# EAGLE board LEDBOARD_v2 (EAGLE 9.5.2)
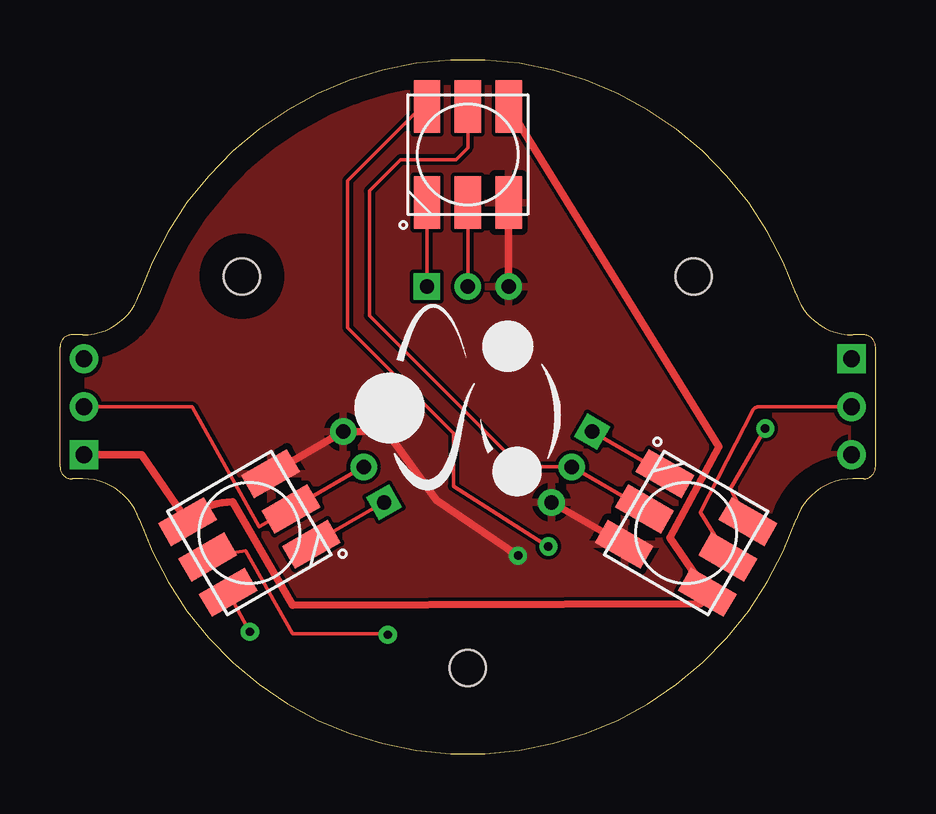
[diagram p0: board, top side]
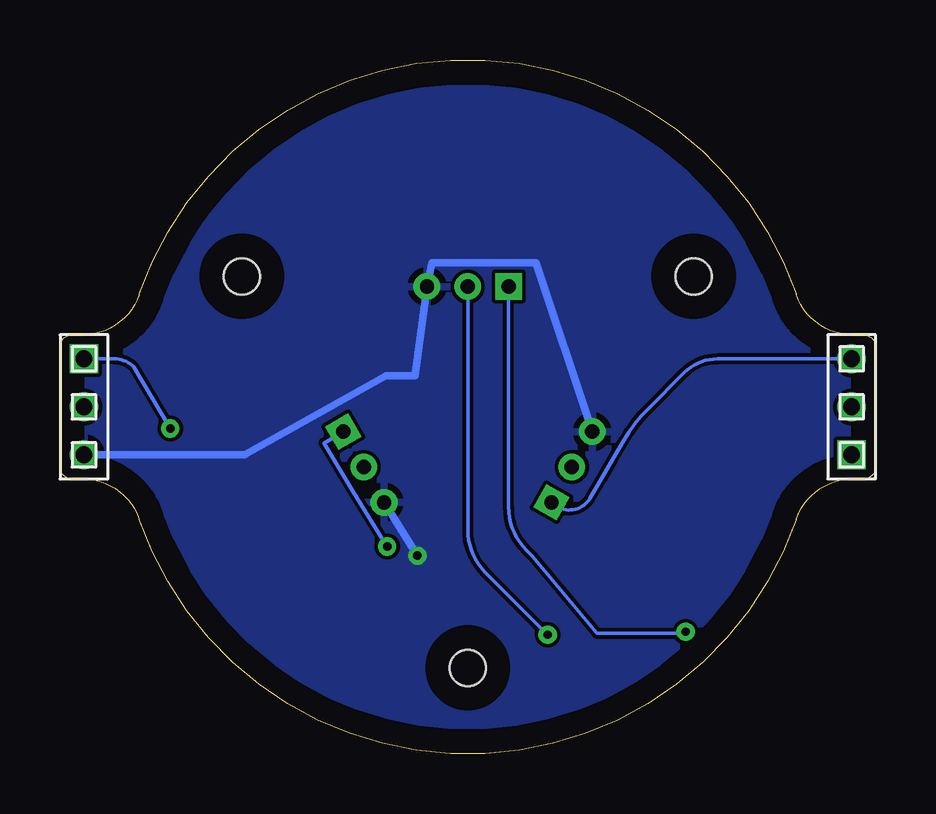
[diagram p1: board, bottom side, seen from below]

Size 34 x 28.9 mm. Coordinates in mm from the lower left corner, seen from the top.
Outline: 33.5,11.45 33.05,11.45 arc71 30.69,9.76 arc-142 3.31,9.76 arc71 0.95,11.45 0.5,11.45 arc-90 0,11.95 0,16.95 arc-90 0.5,17.45 0.95,17.45 arc71 3.31,19.14 arc-142 30.69,19.14 arc71 33.05,17.45 33.5,17.45 arc-90 34,16.95 34,11.95 arc-90 33.5,11.45
Copper layers (1*16): Top 0.035mm / dielectric 1.5mm / Bottom 0.035mm
Design rules "default": minimum track width 6mil, minimum drill 0.35mm, track to track 6mil, track to pad 6mil, pad to pad 6mil, via to via 6mil, smd to smd 6mil, copper to edge 40mil, drill to drill 6mil, minimum pad ring 10mil, minimum via ring 8mil, stop-mask expansion 4mil, vias tented up to drill 0mil, thermal gap 10mil
Net classes: 0 default: width 0.152 mm; 1 power: width 0.254 mm

## Footprints (pad centres in the part's own frame; a part is rotated, then mirrored left to right if it is on the bottom)
APA102_5050_SB = smd 1.1 x 2.2: 1 1.7,4; 2 0,4; 3 -1.7,4; 4 -1.7,0; 5 0,0; 6 1.7,0 | drill 0.6: CI2 0,7.5; GND2 -1.7,7.5 | drill 0.6 square: DI2 1.7,7.5
SMARTBALL_LOGO = hole 1.5: 0,-10.876; -9.419,5.438; 9.419,5.438
CONN03_SMD_MALE = drill 0.7 square: 1 -2,0 | drill 0.7: 2 0,0; 3 2,0

## Placement (x,y rotation side)
L1  APA102  [APA102_5050_SB]  6.16,8.2 300 top
L2  APA102  [APA102_5050_SB]  17,26.96 180 top
L3  APA102  [APA102_5050_SB]  27.84,8.2 60 top
U$4  LOGO_SMARTBALL  [SMARTBALL_LOGO]  17,14.45 0 top
U$5  CONN_03_SMD_MALECONN03_SMD_MALE  [CONN03_SMD_MALE]  1,14.45 90 bottom
U$6  CONN_03_SMD_MALECONN03_SMD_MALE  [CONN03_SMD_MALE]  33,14.45 270 bottom

## Library data of the parts
L1-L3 U$4-U$6 = Smartball

## Nets
+5V: L1.4 L2.4 L3.4 U$5.1
CI: L1.2 L1.CI2 U$5.2
CO: L3.5 U$6.2
DI: L1.1 L1.DI2 U$5.3
DO: L3.6 U$6.1
GND: L1.3 L1.GND2 L2.3 L2.GND2 L3.3 L3.GND2 U$6.3
N$7: L1.6 L2.1 L2.DI2
N$8: L1.5 L2.2 L2.CI2
N$9: L2.6 L3.1 L3.DI2
N$10: L2.5 L3.2 L3.CI2

## Tracks (layer width: path | path; a pad name or v marks a point on that pad's centre or on a via)
+5V
  Top 0.305: L2.4 27.47,12.79 25.43,8.99 L3.4 26.7,6.25 9.7,6.19 7.19,10.5 arc45 5.4,9.75 L1.4 3.4,12.45 U$5.1
CI
  Top 0.152: U$5.2 5.5,14.45 8.3,9.45 L1.2 L1.CI2
CO
  Top 0.152: L3.5 26.7,10.05 28.9,14.35 arc-45 29.14,14.45 U$6.2
DI
  Top 0.152: L1.1 L1.DI2
  Bottom 0.152: U$5.3 6.6,16.45 arc-45 7.97,15.89 9.5,14.35 arc-15 10.5,13.05 arc0 11.9,10.65 arc107 L1.DI2
DO  (via drill 0.35)
  Top 0.152: L3.6 27.95,11.05 v29.4,13.55
  Bottom 0.152: v29.4,13.55 30.92,16.12 arc-45 31.73,16.45 U$6.1
GND  (via drill 0.35)
  Top 0.305: L2.3 L2.GND2 | L3.3 L3.GND2 | v19.1,8.25 15.7,10.55 13.6,13.45 L1.GND2 L1.3
  Bottom 0.305: U$6.3 26.3,12.45 20.4,15.75 19.19,15.75 L2.GND2 18.5,20.45 14.15,20.45 L1.GND2 | L3.GND2 v19.1,8.25
  pour Bottom: -0.5,31.95 -0.5,-3.05 34.5,-3.05 34.5,31.95
  pour Top: -0.5,31.95 -0.5,-3.05 34.5,-3.05 34.5,31.95
N$7  (via drill 0.35)
  Top 0.152: L1.6 v7.92,5.08 | L2.1 L2.DI2
  Bottom 0.152: v7.92,5.08 7.97,5.02 11.61,5.02 14.32,8.25 14.56,8.49 arc45 15.3,10.28 L2.DI2
N$8  (via drill 0.35)
  Top 0.152: L1.5 7.74,8.46 9.7,5.01 13.67,5.01 v13.67,4.96 | L2.2 L2.CI2
  Bottom 0.152: L2.CI2 17,9.34 arc-45 16.26,7.54 v13.67,4.96
N$9  (via drill 0.35)
  Top 0.152: L2.6 15.08,26.96 12,23.88 12,17.76 16.4,13.35 16.4,11.15 v20.36,8.63 | L3.DI2 L3.1
  Bottom 0.152: v20.36,8.63 21.8,10.95 22.99,12.94 L3.DI2
N$10
  Top 0.152: L2.5 17,25.25 16.5,24.75 14.2,24.75 12.9,23.45 12.9,18.25 18.96,12.19 arc45 19.55,11.95 L3.CI2 L3.2